# Altium PCB mach_ve.PcbDoc
Units mil, origin at the board's own origin, x right, y up, seen from the top; angles counter-clockwise.
Board outline 2655 x 2565 mil, 2 copper layers (Top Layer, Bottom Layer); 19 components, 9 nets, 47 pads, 0 vias.
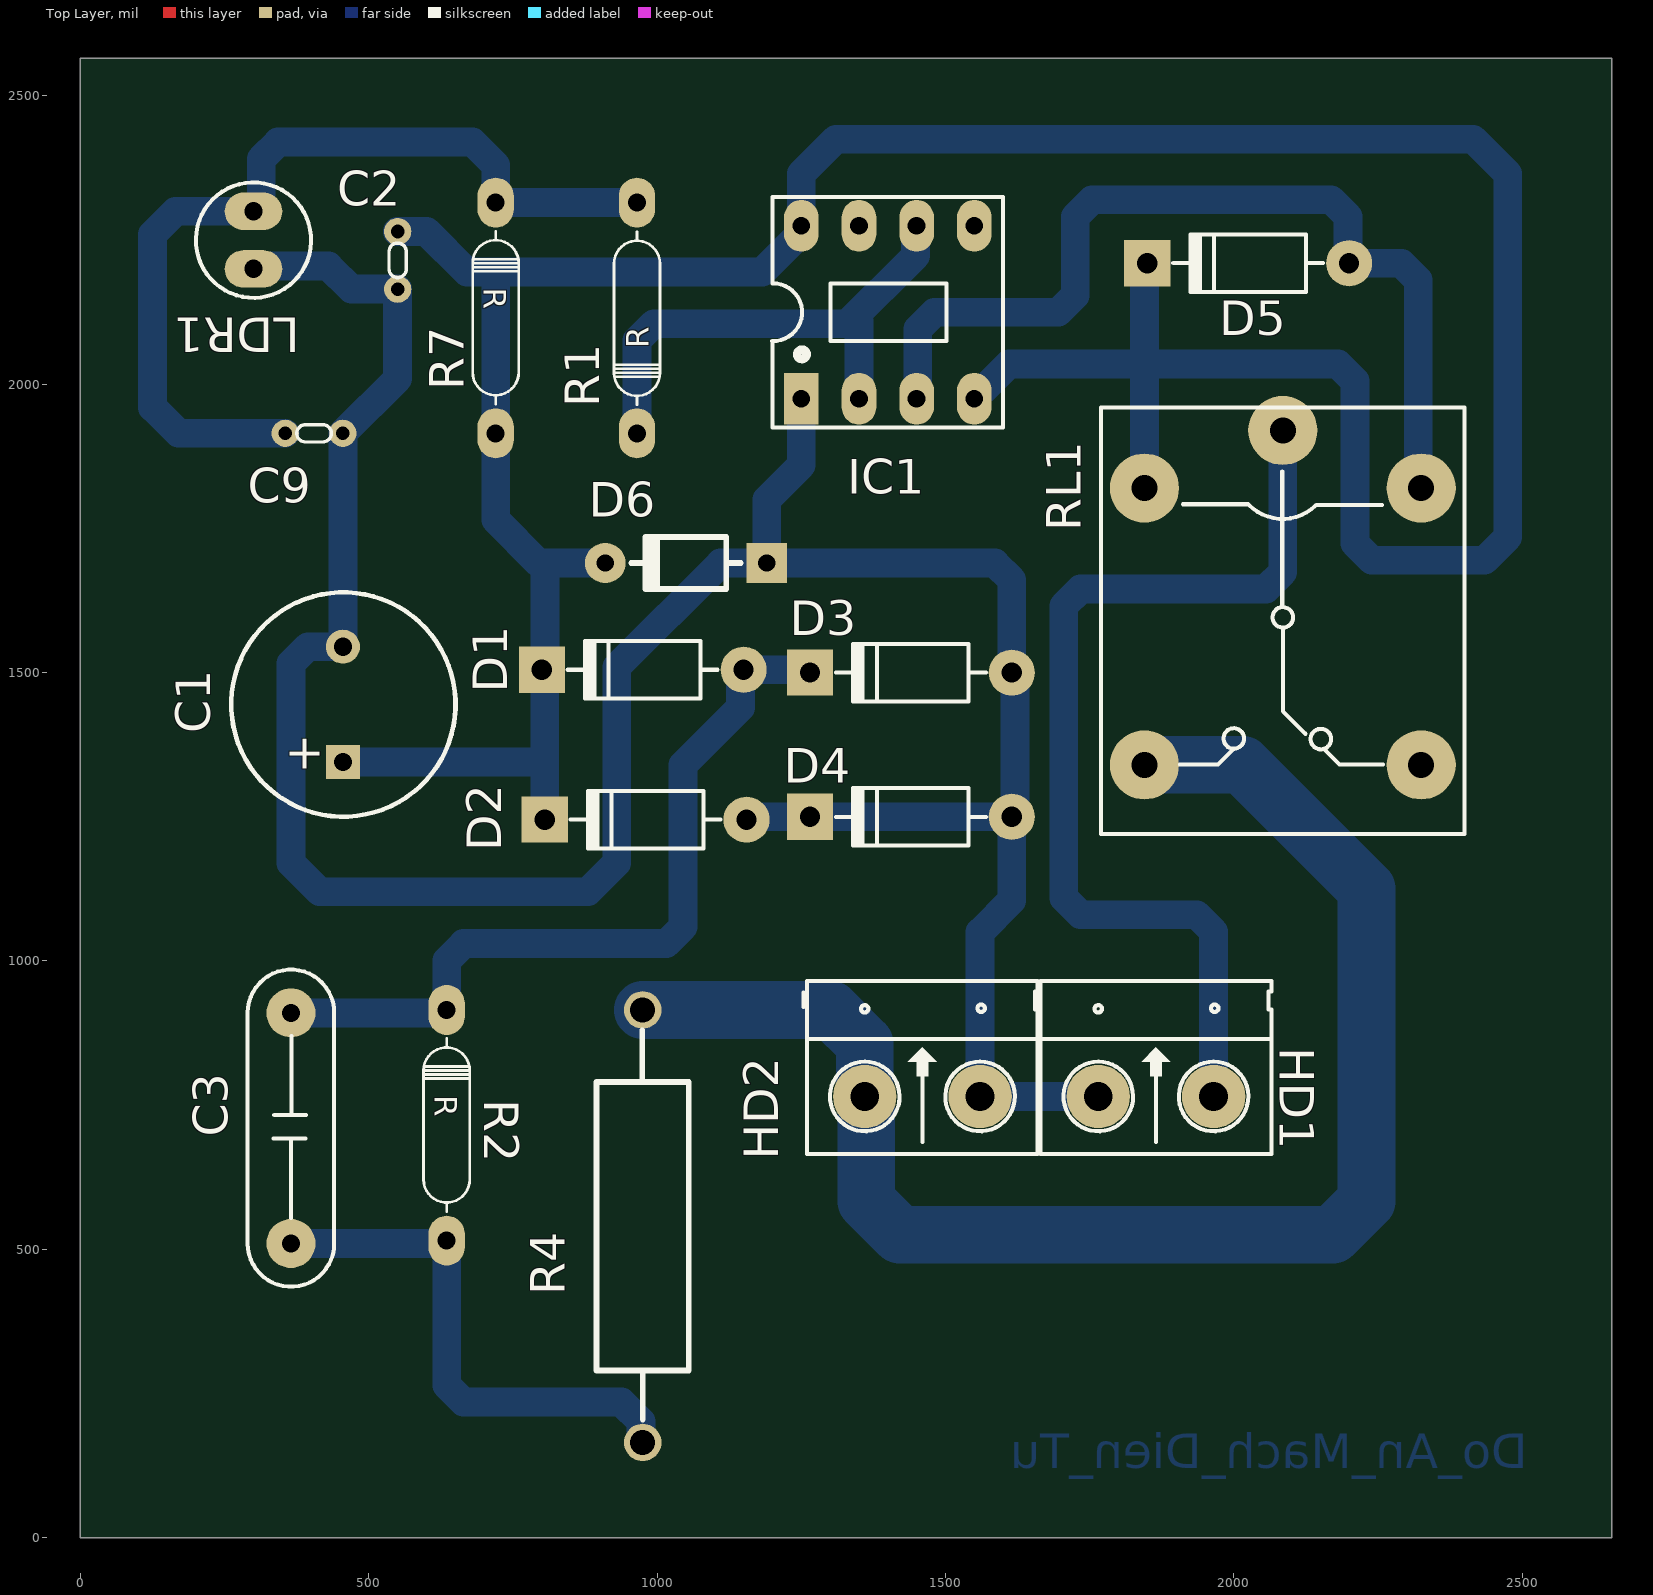
[diagram p0: Top Layer view]
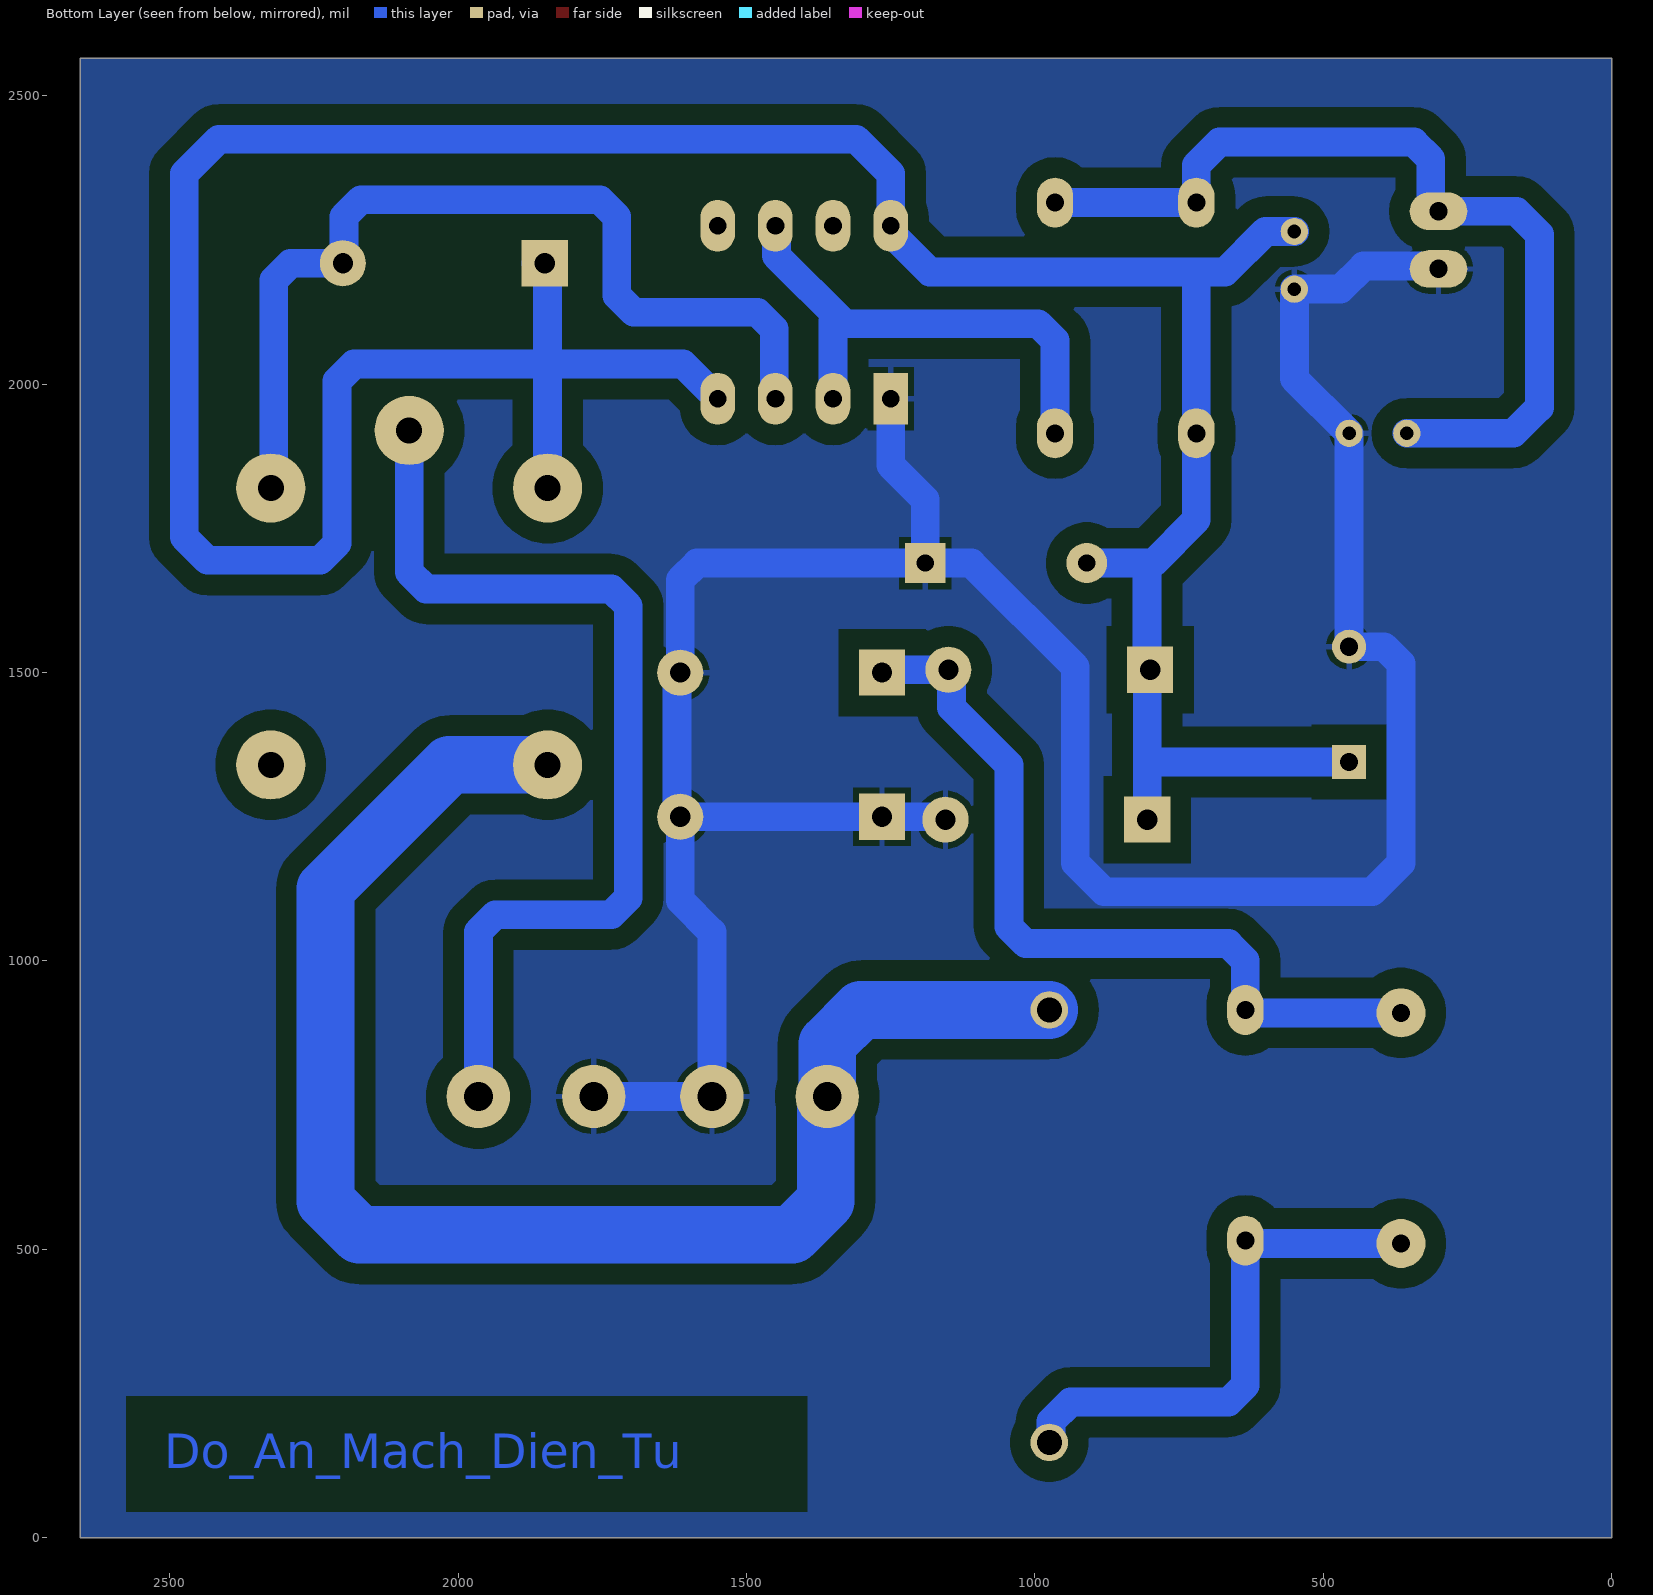
[diagram p1: Bottom Layer view, seen from below]
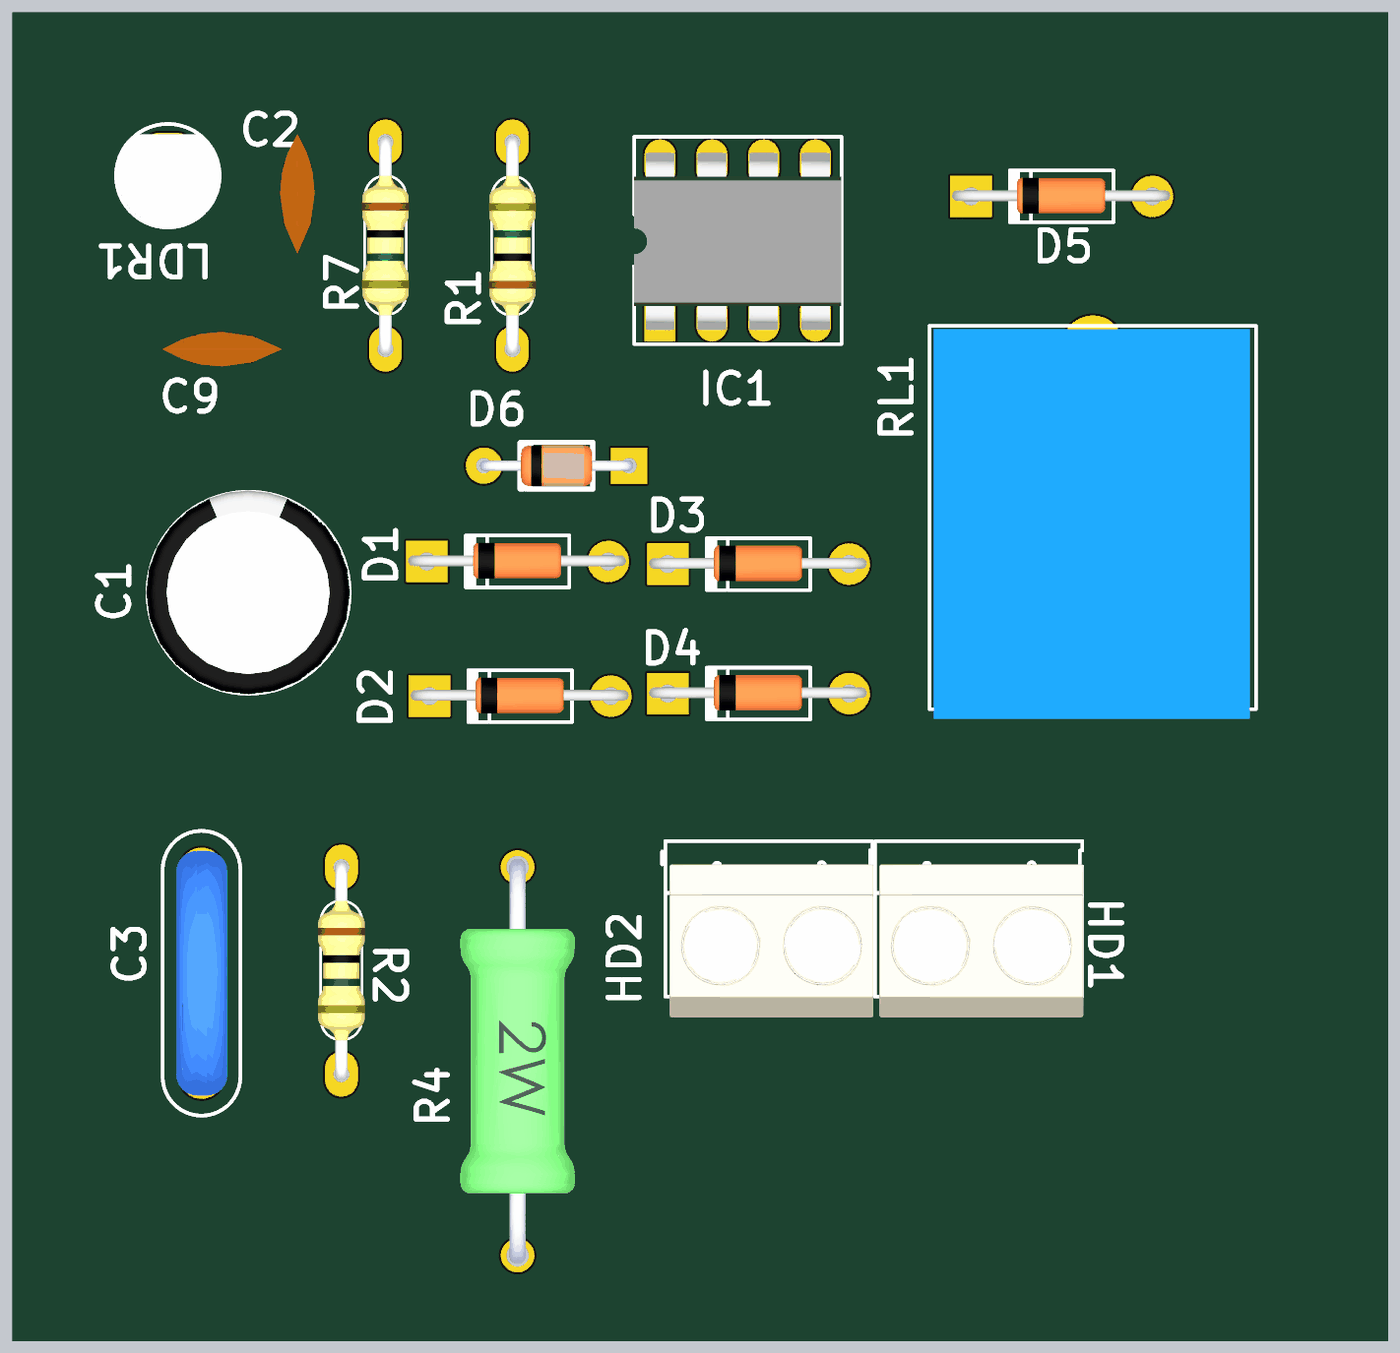
[diagram p2: 3D render of the assembled board from above, using the file's embedded part models]

## Layer stack, top to bottom
Top Solder: solder mask 0.4, Solder Resist, Dk 3.5
Top Layer: signal copper 1.4
Dielectric 1: dielectric 12.6, FR-4, Dk 4.8
Bottom Layer: signal copper 1.4
Bottom Solder: solder mask 0.4, Solder Resist, Dk 3.5

## Board outline
0,0 2655,0 2655,2565 0,2565

## Design rules (kind name [scope] priority, off if disabled: settings)
Clearance [All] p1: gap=35.43 ignorepadtopadclearanceinfootprint=FALSE
PolygonConnect [All] p1: connectstyle=Relief reliefconductorwidth=10 reliefentries=4 polygonreliefangle="90 Angle" airgapwidth=10
RoutingLayers [All] p1: top layer_v5=FALSE bottom layer_v5=TRUE
RoutingVias [All] p1: holewidth=28 width=50 viastyle="Through Hole" minholewidth=28 minwidth=50 maxholewidth=28 maxwidth=50
SolderMaskExpansion [All] p1: expansion=4 istentingtop=FALSE
Width [All] p1: maxlimit=50 minlimit=10 preferedwidth=50 toplayer_maxwidth=10 toplayer_prefwidth=10 bottomlayer_minwidth=50 minimp=50.000000 maximp=50.000000 favimp=50.000000
29 further rules are at their usual default settings.

## Classes and differential pairs
component class mach_ve: C1 C2 C3 C9 D1 D2 D3 D4 D5 D6 HD1 IC1 LDR1 R1 R2 R4 R7 RL1

## Components (designator, comment, footprint, x,y, rotation, side; value= is the part's Value field where it differs from the comment)
C1 "470uF/25V" C10mm 455,1445 r90 top
C2 "Capacitor Ceramic" Tu-pico 550,2165 r90 top value=100nF
C3 "474/400V" CN4 365,510 r90 top value=0.47uF
C9 "Capacitor Ceramic" Tu-pico 455,1915 r180 top value=100nF
D1 "1N4007" D1A 1150,1505 r0 top
D2 "1N4007" D1A 1155,1245 r0 top
D3 "1N4007" D1A 1615,1500 r0 top
D4 "1N4007" D1A 1615,1250 r0 top
D5 "1N4007" D1A 2200,2210 r0 top
D6 "12V/2W" DIODE_ZENER 1190,1690 r180 top
HD1 "Header 2" HED2 1765,765 r0 top
HD2 "Header 2" HED2 1360,765 r0 top
IC1 "LM555" DIP8/W0.3 1250,1975 r0 top
LDR1 "LDR" CDS 300,2200 r90 top
R1 "R0.4W" "DIEN TRO 1/4 W" 965,1915 r90 top value=100K
R2 "R0.4W" "DIEN TRO 1/4 W" 635,915 r270 top value=1M
R4 "10/2W" R2W 975,540 r270 top value="R2W - 47"
R7 "R0.4W" "DIEN TRO 1/4 W" 720,2315 r270 top value=330K
RL1 "Relay 10A/12V" RL_SPDT_10A 2085,1920 r270 top value="Relay SPDT, 10A, 12V"

## Footprints (in the part's own frame and the unit in brackets; to place one, negate y for a bottom-side part, rotate by r counter-clockwise, add the part's x,y. Pads: shape width x height; smd on the part's side, far side on the other; paste and mask are expansions set on the pad)
C10mm [mm]
  rect 1.5x1.5 hole 0.8: 1(-2.54,0)
  round 1.5 hole 0.8: 2(2.54,0)
  silkscreen extent -4.95,-4.96 4.93,4.92, body extent -5,-5 4.97,5, height 20.01
CDS [mil] "QUANG TRO"
  oval 65x100 hole 32: 1(0,0) 2(100,0)
  silkscreen extent -50,-100 150,100, body extent -47,-99 130,97, height 159
CN4 [mil] "Cap np W 0.4"
  round 85 hole 31: 1(0,0) 2(400,0)
  silkscreen extent -75,-75 475,75, body extent -36,-50 436,48, height 591
D1A [mil] "Diode 1A, W 100mil, L 350mil"
  round 80 hole 35: 1(0,0)
  rect 80x80 hole 35: 2(-350,0)
  silkscreen extent -305,-50 -45,50, body extent -386,-33 34,36, height 84
"DIEN TRO 1/4 W" [mm]
  oval 2.2x1.6 hole 0.787: 1(0,0) 2(10.16,0)
  silkscreen extent 1.26,-1.02 8.88,1.02, body extent -0.3,-1.16 10.46,1.16, height 2.93
DIODE_ZENER [mil]
  rect 70x70 hole 30: 1(0,0)
  round 70 hole 30: 2(280,0)
  silkscreen extent 45,-45 235,45, body extent -8,-39 287,39, height 89
DIP8/W0.3 [mil] "8 PIN, W 300mil, Pin to pin 100mil"
  rect 60x90 hole 31: 1(0,0)
  oval 60x90 hole 31: 2(100,0) 3(200,0) 4(300,0) 5(300,300) 6(200,300) 7(100,300) 8(0,300)
  silkscreen extent -50,-50 350,350, body extent -50,-40 350,336, height 201
HED2 [mil] "Header 2, 2 pin, hight 300mil, Pin to Pin 200, Colour Green"
  round 110 hole 50: 1(0,0) 2(200,0)
  silkscreen extent -106,-100 300,200, body extent -92,-140 302,155, height 394
R2W [mil] "dien tro 2W"
  round 65 hole 43.31: 1(-375,0) 2(375,0)
  silkscreen extent -340,-80 335,80, body extent -391,-110 391,110, height 307
RL_SPDT_10A [mil] "Relay SPDT, 5 pin, 10A,W 650mil, L 800mil, H 800mil"
  round 120 hole 45: 1(0,0) 2(580,240) 3(580,-240) 4(100,-240) 5(100,240)
  silkscreen extent -40,-315 700,315, body extent -33,-307 719,303, height 642
Tu-pico [mm] "Tu gom mini"
  round 1.2 hole 0.6: 1(0,0) 2(2.54,0)
  silkscreen extent 0.51,-0.38 2.03,0.38, body extent -1.65,-0.85 4.19,0.85, height 6.12

## Part data
C1: library part "Cap Pol 12mm", "Polarized Capacitor (Axial)", LatestRevisionDate=17-Jul-2002, LatestRevisionNote="Re-released for DXP Platform.", PackageReference=POLAR0.8, Published=8-Jun-2000, Publisher="Altium Limited"
C2 C9: library part CapCeramic, "Capacitor", LatestRevisionDate=17-Jul-2002, LatestRevisionNote="Re-released for DXP Platform.", PackageReference=RAD-0.3, Published=8-Jun-2000, Publisher="Altium Limited"
C3: library part CN4, "Cap np W0.4"
D1 D2 D3 D4 D5: library part D1A, "Diode 1A"
D6: library part "Diode Zener", "Zener Diode", LatestRevisionDate=17-Jul-2002, LatestRevisionNote="Re-released for DXP Platform.", PackageReference=DIODE-0.7, Published=8-Jun-2000, Publisher="Altium Limited"
HD1 HD2: library part Hed2, "Header 2 (Green)"
IC1: "Timer"
LDR1: "Quang Tro"
R1 R2 R7: library part "Res 1/4 W", "Resistor", LatestRevisionDate=17-Jul-2002, LatestRevisionNote="Re-released for DXP Platform.", PackageReference=AXIAL-0.4, Published=8-Jun-2000, Publisher="Altium Limited"
R4: library part R2W, "Resistor 2W"
RL1: library part "Relay 1", "Relay SPDT,10A - 12VDC 5 Pin"

## Nets (pads, with @x,y where several pads share a name; then routed paths per layer and width w, separated by ;. In a path a pad name is that pad's centre, name@x,y a point inside that pad or via, vN(x,y) a via of type N, cw(c..) or ccw(c..) an arc to the next point about the centre after c; other vN are vias at no path point)
+12V: C1.1 C2.2 D1.2 D2.2 D5.2 D6.2 IC1.4 IC1.8 R7.2 RL1.4 | length 5892.1
  Bottom Layer w50: C1.1 805,1345 ; C2.2 600,2265 670,2195 720,2195 ; D2.2 805,1345 ; D6.2 805.53,1690 ; IC1.4 1550,1987.29 1554.62,1991.91 1566.91,1991.91 1610,2035 1845,2035 ; RL1.4 1845,2015 1845,2035 ; D5.2@1865,2210 1845,2190 1845,2035 ; 720,2195 1182.29,2195 1250,2262.71 IC1.8 1250,2365 1310,2425 2415,2425 2475,2365 2475,1735 2435,1695 2239.29,1695 2210,1724.29 2210,2005.71 2180.71,2035 1845,2035 ; 720,2195 R7.2 720,1765 795,1690 805.53,1690 ; 805,1345 805,1500 D1.2 805.53,1510.53 805.53,1690
+220V: HD2.1 R4.1 RL1.3 | length 2617.4
  Bottom Layer w100: R4.1 1301.42,915 1360,856.42 HD2.1@1360,762.29 ; HD2.1 1362.5,762.5 1362.5,583.58 1421.08,525 2171.42,525 2200.71,554.29 2230,583.58 2230,1125 2015,1340 RL1.3
GND: C1.2 C2.1 C9.1 D2.1 D3.1 D4.1 D4.2 D6.1 HD1.1 HD2.2 IC1.1 LDR1.1 | length 4983.6
  Bottom Layer w50: LDR1.1 302.87,2202.87 330.98,2202.87 333.11,2205 430,2205 470,2165 C2.1 550,2010 C9.1 C1.2 394.29,1545 365,1515.71 365,1170 415,1120 880,1120 930,1170 930,1510 1110,1690 D6.1 ; D2.1 1160,1250 D4.2 D4.1 1615,1105 1560,1050 HD2.2 HD1.1 ; IC1.1 1250,1860 1190,1800 D6.1 ; D4.1@1620.74,1258.12 1620.74,1486.14 1615,1491.88 D3.1 1615,1660.71 1585.71,1690 D6.1
NetC3_1: C3.1 R2.2 R4.2 | length 921.3
  Bottom Layer w50: C3.1 R2.2@635,510 ; R2.2 R2.2@635,510 ; R4.2 972.13,167.87 972.13,201.08 938.21,235 664.29,235 635,264.29 R2.2@635,510
NetC3_2: C3.2 D1.1 D3.2 R2.1 | length 1401.2
  Bottom Layer w50: C3.2 635,910 R2.1 635,1000.71 664.29,1030 1015.71,1030 1045,1059.29 1045,1340 1144.26,1439.26 1144.26,1499.26 D1.1 1260,1505 D3.2
NetC9_2: C9.2 LDR1.2 R1.2 R7.1 | length 1576.2
  Bottom Layer w50: LDR1.2 165,2300 125,2260 125,1960 170,1915 C9.2 ; LDR1.2@313.44,2300 313.44,2390.71 342.73,2420 680,2420 720,2380 R7.1 R1.2
NetD5_1: D5.1 IC1.3 RL1.5 | length 1629
  Bottom Layer w50: IC1.3 1451.91,1976.91 1451.91,2095.71 1481.2,2125 1695.71,2125 1725,2154.29 1725,2290.71 1754.29,2320 2168.79,2320 2198.08,2290.71 2198.08,2211.92 D5.1 2290.71,2210 2320,2180.71 2320,1825 RL1.5
NetHD1_2: HD1.2 RL1.1 | length 1726.4
  Bottom Layer w50: HD1.2 1965,1050.71 1935.71,1080 1734.29,1080 1705,1109.29 1705,1615.71 1734.29,1645 2055.71,1645 2085,1674.29 RL1.1
NetIC1_2: IC1.2 IC1.6 R1.1 | length 927.5
  Bottom Layer w50: R1.1 965,2075.71 994.29,2105 1350,2105 ; 1330,2105 1448.09,2223.09 1448.09,2273.09 IC1.6 ; 1335,2110 1350,2110 IC1.2
pads on no net: IC1.5 IC1.7 RL1.2

## Polygon pours and split planes (outlines as drawn)
GND on Bottom Layer "GND_L02_P000" (solid, remove dead copper, pour order 0): 0,2565 2655,2565 2655,0 0,0

## Other copper
Bottom Layer:
  text "Do_An_Mach_Dien_Tu" at 2510,120 h60

## Text inside footprints (layer, text, board x,y; h text height)
C1: Top Overlay "+" at 415,1325 h60 r90
R1: Top Overlay "R" at 985.5,2062.5 h39.37 r90
R2: Top Overlay "R" at 614.5,767.5 h39.37 r270
R7: Top Overlay "R" at 699.5,2167.5 h39.37 r270